# Altium PCB CR-10 Motherboard.PcbDoc (part 10 of 14)
Units mil, origin at the board's own origin, x right, y up, seen from the top; angles counter-clockwise.
Board outline 3970.48 x 2769.68 mil, 2 copper layers (TopLayer, BottomLayer); 147 components, 128 nets, 667 pads, 614 vias.
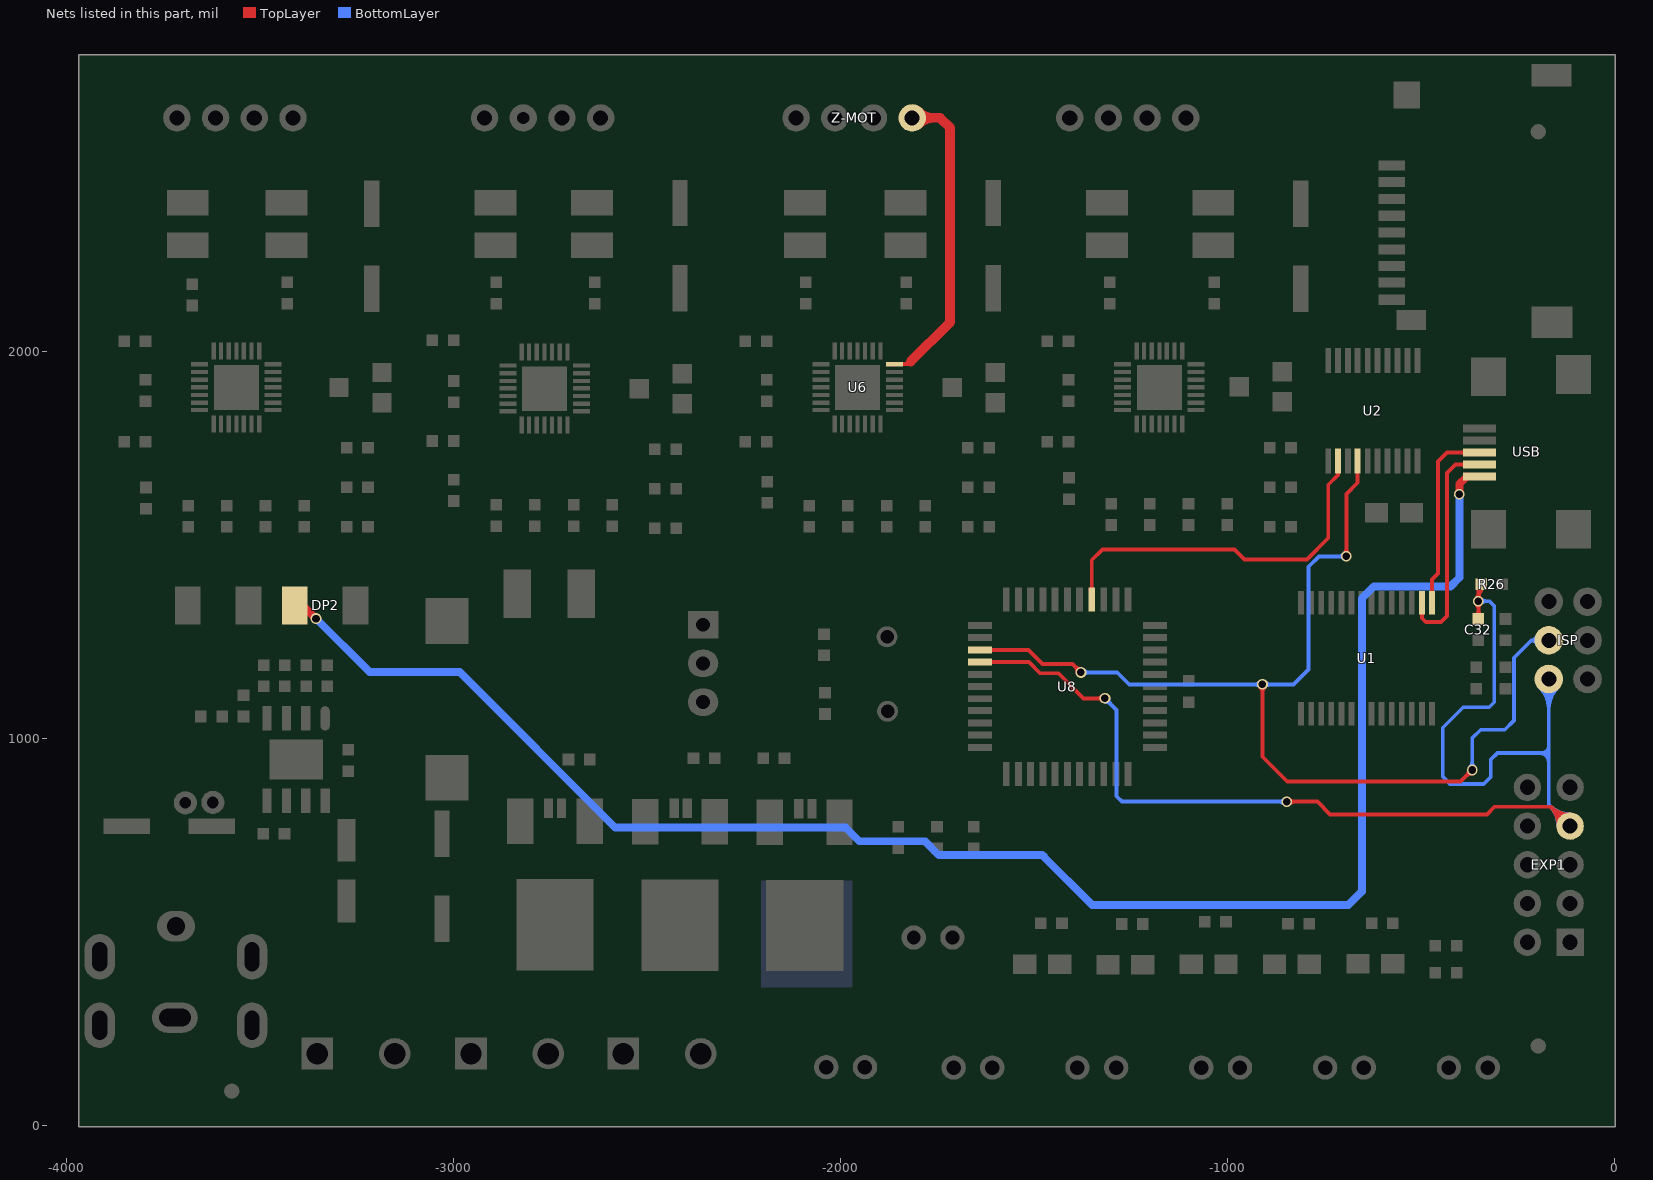
[diagram p10: the nets of this part, all layers, seen from the top]

## Via types
v1: diameter 28, hole 18, TopLayer to BottomLayer, tented both sides, 246 vias
v2: diameter 27.56, hole 19.68, TopLayer to BottomLayer, tented both sides, 196 vias
v3: diameter 20, hole 12, TopLayer to BottomLayer, tented both sides, 124 vias
v4: diameter 27.56, hole 11.81, TopLayer to BottomLayer, tented bottom, 16 vias
v5: diameter 27.56, hole 19.68, TopLayer to BottomLayer, 16 vias
v6: diameter 20, hole 12, TopLayer to BottomLayer, 12 vias
v7: diameter 28, hole 11.81, TopLayer to BottomLayer, tented both sides, 4 vias

## Nets (pads, with @x,y where several pads share a name; then routed paths per layer and width w, separated by ;. In a path a pad name is that pad's centre, name@x,y a point inside that pad or via, vN(x,y) a via of type N, cw(c..) or ccw(c..) an arc to the next point about the centre after c; other vN are vias at no path point) (continued)
NetZ-MOT_4: U6.21 Z-MOT.4 | length 1246.7
  TopLayer w10: U6.21@-1860.62,1967.88 -1860.12,1968.38 -1826,1968.38
  TopLayer w25: -1818.54,1974.84 -1717.07,2076.3 -1717.07,2575.25 ; Z-MOT.4@-1814.54,2604.84 -1742.54,2604.84 -1717.07,2579.38 -1717.07,2465.84 ; Z-MOT.4@-1798.32,2588.63 cw(c-1759.17,2549.48) -1759.17,2604.84 ; Z-MOT.4@-1798.32,2588.63 cw(c-1759.17,2549.48) -1759.17,2604.84 ; Z-MOT.4@-1798.32,2588.63 cw(c-1759.17,2549.48) -1759.17,2604.84 ; Z-MOT.4@-1798.32,2588.63 cw(c-1759.17,2549.48) -1759.17,2604.84 ; Z-MOT.4@-1798.32,2621.06 ccw(c-1759.17,2660.21) -1759.17,2604.84 ; Z-MOT.4@-1798.32,2621.06 ccw(c-1759.17,2660.21) -1759.17,2604.84 ; Z-MOT.4@-1798.32,2621.06 ccw(c-1759.17,2660.21) -1759.17,2604.84 ; Z-MOT.4@-1798.32,2621.06 ccw(c-1759.17,2660.21) -1759.17,2604.84
RESET: C32.2 EXP1.7 ISP.5 R26.1 U8.4 | length 4399.4
  TopLayer w10: U8.4@-1639.54,1198.84 -1512.84,1198.84 -1483.84,1169.84 -1436.54,1169.84 -1371.54,1104.84 v2(-1316.54,1104.84) ; v2(-846.54,837.84) -767.54,837.84 -734.54,804.84 -329.54,804.84 -309.54,824.84 -164.54,824.84 ; v2@-840.33,831.63 cw(c-825.34,816.65) -825.34,837.84 cw(c-825.34,859.04) v2@-840.33,844.05 ; C32.2@-358.61,1316.91 ccw(c-375.68,1333.98) -351.54,1333.98 ccw(c-327.39,1333.98) C32.2@-344.46,1316.91 ; v2@-357.74,1349.63 cw(c-372.73,1334.65) -351.54,1334.65 cw(c-330.34,1334.65) v2@-345.33,1349.63 ; v2@-357.74,1362.05 ccw(c-372.73,1377.04) -351.54,1377.04 ccw(c-330.34,1377.04) v2@-345.33,1362.05 ; C32.2@-351.54,1309.84 -351.54,1392.84 R26.1@-344.54,1399.84 ccw(c-327.64,1382.94) -351.54,1382.94 ; v2@-351.54,1358.8 cw(c-303.49,1358.8) R26.1@-337.46,1392.77 ; EXP1.7@-144.96,775.68 ccw(c-211.85,777.52) -164.53,824.84 ; EXP1.7@-134.96,775.4 ccw(c-179.88,776.64) -148.1,808.41 ccw(c-116.33,840.18) EXP1.7@-115.1,795.27 ; EXP1.7@-115.37,805.26 cw(c-117.21,872.16) -164.53,824.84 ; EXP1.7@-114.54,774.84 -164.54,824.84 ; U8.4@-1614.71,1196.01 cw(c-1607.88,1189.18) -1607.88,1198.84 ; U8.4@-1614.71,1196.01 cw(c-1607.88,1189.18) -1607.88,1198.84 ; U8.4@-1614.71,1196.01 cw(c-1607.88,1189.18) -1607.88,1198.84 ; U8.4@-1614.71,1196.01 cw(c-1607.88,1189.18) -1607.88,1198.84 ; U8.4@-1614.71,1196.01 cw(c-1607.88,1189.18) -1607.88,1198.84 ; U8.4@-1614.71,1196.01 cw(c-1607.88,1189.18) -1607.88,1198.84 ; U8.4@-1614.71,1201.67 ccw(c-1607.88,1208.5) -1607.88,1198.84 ; U8.4@-1614.71,1201.67 ccw(c-1607.88,1208.5) -1607.88,1198.84 ; U8.4@-1614.71,1201.67 ccw(c-1607.88,1208.5) -1607.88,1198.84 ; U8.4@-1614.71,1201.67 ccw(c-1607.88,1208.5) -1607.88,1198.84 ; U8.4@-1614.71,1201.67 ccw(c-1607.88,1208.5) -1607.88,1198.84 ; U8.4@-1614.71,1201.67 ccw(c-1607.88,1208.5) -1607.88,1198.84 ; -1337.73,1104.84 cw(c-1337.73,1083.65) -1322.74,1098.63 ccw(c-1337.73,1083.65) -1337.73,1104.84 ; -1337.73,1104.84 ccw(c-1337.73,1126.04) -1322.74,1111.05 cw(c-1337.73,1126.04) -1337.73,1104.84
  BottomLayer w10: v2(-1316.54,1104.84) -1286.54,1074.84 -1286.54,851.84 -1272.54,837.84 v2(-846.54,837.84) ; v2@-852.74,831.63 ccw(c-867.73,816.65) -867.73,837.84 ccw(c-867.73,859.04) v2@-852.74,844.05 ; v2(-351.54,1355.84) -322.54,1355.84 -310.54,1343.84 -310.54,1094.84 -323.54,1081.84 -390.54,1081.84 -443.54,1028.84 -443.54,902.84 -424.54,883.84 -337.54,883.84 -319.54,901.84 -319.54,946.84 -302.54,963.84 -169.54,963.84 ; v2@-345.33,1349.63 cw(c-330.34,1334.65) -330.34,1355.84 cw(c-330.34,1377.04) v2@-345.33,1362.05 ; ISP.5@-192.16,1132.22 cw(c-246.79,1077.59) -169.54,1077.59 cw(c-92.28,1077.59) ISP.5@-146.91,1132.22 ; ISP.5@-185.09,1139.29 cw(c-222.65,1101.73) -169.54,1101.73 cw(c-116.42,1101.73) ISP.5@-153.98,1139.29 ; -169.54,939.84 ccw(c-193.54,939.84) -193.54,963.84 ccw(c-188.54,982.84) -169.54,977.84 ; ISP.5@-169.54,1154.84 -169.54,829.84 EXP1.7@-114.54,774.84 ; EXP1.7@-144.97,774.84 ccw(c-218.44,774.84) -166.49,826.79 ccw(c-114.54,878.75) EXP1.7@-114.54,805.28 ; EXP1.7@-134.97,774.84 ccw(c-184.3,774.84) -149.42,809.72 ccw(c-114.54,844.61) EXP1.7@-114.54,795.28 ; -1301.55,1089.85 cw(c-1286.56,1104.84) -1307.76,1104.84 ccw(c-1286.56,1104.84) -1301.55,1089.85 ; -1301.55,1089.85 ccw(c-1316.54,1074.87) -1316.54,1096.06 cw(c-1316.54,1074.87) -1301.55,1089.85
SCLK: ISP.3 U2.4 U8.3 | length 3460.2
  TopLayer w10: U8.3@-1639.54,1229.84 -1513.84,1229.84 -1477.84,1193.84 -1400.54,1193.84 v2(-1378.54,1171.84) ; v2(-909.54,1140.84) -909.54,953.84 -845.54,889.84 -397.54,889.84 v2(-367.54,919.84) ; v2(-692.54,1471.84) -692.54,1632.84 -663.54,1661.84 U2.4@-663.54,1733.84 ; v2@-376.31,919.84 cw(c-397.51,919.84) -382.52,904.85 cw(c-367.54,889.87) v2@-367.54,911.06 ; U8.3@-1614.71,1227.01 cw(c-1607.88,1220.19) -1607.88,1229.84 ; U8.3@-1614.71,1227.01 cw(c-1607.88,1220.19) -1607.88,1229.84 ; U8.3@-1614.71,1227.01 cw(c-1607.88,1220.19) -1607.88,1229.84 ; U8.3@-1614.71,1227.01 cw(c-1607.88,1220.19) -1607.88,1229.84 ; U8.3@-1614.71,1227.01 cw(c-1607.88,1220.19) -1607.88,1229.84 ; U8.3@-1614.71,1227.01 cw(c-1607.88,1220.19) -1607.88,1229.84 ; U8.3@-1614.71,1232.67 ccw(c-1607.88,1239.5) -1607.88,1229.84 ; U8.3@-1614.71,1232.67 ccw(c-1607.88,1239.5) -1607.88,1229.84 ; U8.3@-1614.71,1232.67 ccw(c-1607.88,1239.5) -1607.88,1229.84 ; U8.3@-1614.71,1232.67 ccw(c-1607.88,1239.5) -1607.88,1229.84 ; U8.3@-1614.71,1232.67 ccw(c-1607.88,1239.5) -1607.88,1229.84 ; U8.3@-1614.71,1232.67 ccw(c-1607.88,1239.5) -1607.88,1229.84 ; -1393.52,1186.83 cw(c-1408.51,1171.84) -1387.31,1171.84 ccw(c-1408.51,1171.84) -1393.52,1186.83 ; -1393.52,1186.83 ccw(c-1378.54,1201.82) -1378.54,1180.62 cw(c-1378.54,1201.82) -1393.52,1186.83 ; -909.54,1119.65 cw(c-888.34,1119.65) -903.33,1134.63 ccw(c-888.34,1119.65) -909.54,1119.65 ; -909.54,1119.65 ccw(c-930.73,1119.65) -915.74,1134.63 cw(c-930.73,1119.65) -909.54,1119.65 ; -692.54,1493.04 cw(c-713.73,1493.04) -698.74,1478.05 ccw(c-713.73,1493.04) -692.54,1493.04 ; -692.54,1493.04 ccw(c-671.34,1493.04) -686.33,1478.05 cw(c-671.34,1493.04) -692.54,1493.04
  BottomLayer w10: v2(-1378.54,1171.84) -1284.54,1171.84 -1253.54,1140.84 -829.54,1140.84 -790.54,1179.84 -790.54,1444.84 -763.54,1471.84 v2(-692.54,1471.84) ; v2@-373.74,926.05 ccw(c-388.73,941.04) -367.54,941.04 ccw(c-346.34,941.04) v2@-361.33,926.05 ; v2(-367.54,919.84) -367.54,1001.84 -345.54,1023.84 -283.54,1023.84 -259.54,1047.84 -259.54,1209.84 -214.54,1254.84 ; ISP.3@-199.76,1244.34 ccw(c-214.53,1239.2) -214.53,1254.84 ; ISP.3@-199.76,1265.35 cw(c-214.53,1270.48) -214.53,1254.84 ; ISP.3@-169.54,1254.84 -214.54,1254.84 ; -1357.34,1171.84 cw(c-1357.34,1193.04) -1372.33,1178.05 ccw(c-1357.34,1193.04) -1357.34,1171.84 ; -1357.34,1171.84 ccw(c-1357.34,1150.65) -1372.33,1165.63 cw(c-1357.34,1150.65) -1357.34,1171.84 ; -930.73,1140.84 cw(c-930.73,1119.65) -915.74,1134.63 ccw(c-930.73,1119.65) -930.73,1140.84 ; -930.73,1140.84 ccw(c-930.73,1162.04) -915.74,1147.05 cw(c-930.73,1162.04) -930.73,1140.84 ; -888.34,1140.84 cw(c-888.34,1162.04) -903.33,1147.05 ccw(c-888.34,1162.04) -888.34,1140.84 ; -888.34,1140.84 ccw(c-888.34,1119.65) -903.33,1134.63 cw(c-888.34,1119.65) -888.34,1140.84 ; -713.73,1471.84 cw(c-713.73,1450.65) -698.74,1465.63 ccw(c-713.73,1450.65) -713.73,1471.84 ; -713.73,1471.84 ccw(c-713.73,1493.04) -698.74,1478.05 cw(c-713.73,1493.04) -713.73,1471.84
SD-SS: U2.2 U8.37 | length 1073.5
  TopLayer w10: U8.37@-1350.54,1360.84 -1350.54,1461.84 -1322.54,1489.84 -981.54,1489.84 -955.54,1463.84 -794.54,1463.84 -739.54,1518.84 -739.54,1656.84 -714.54,1681.84 U2.2@-714.54,1733.84 ; U8.37@-1353.36,1385.67 ccw(c-1360.19,1392.5) -1350.54,1392.5 ; U8.37@-1353.36,1385.67 ccw(c-1360.19,1392.5) -1350.54,1392.5 ; U8.37@-1353.36,1385.67 ccw(c-1360.19,1392.5) -1350.54,1392.5 ; U8.37@-1353.36,1385.67 ccw(c-1360.19,1392.5) -1350.54,1392.5 ; U8.37@-1353.36,1385.67 ccw(c-1360.19,1392.5) -1350.54,1392.5 ; U8.37@-1353.36,1385.67 ccw(c-1360.19,1392.5) -1350.54,1392.5 ; -1350.54,1392.5 ccw(c-1340.88,1392.5) U8.37@-1347.71,1385.67 ; -1350.54,1392.5 ccw(c-1340.88,1392.5) U8.37@-1347.71,1385.67 ; -1350.54,1392.5 ccw(c-1340.88,1392.5) U8.37@-1347.71,1385.67 ; -1350.54,1392.5 ccw(c-1340.88,1392.5) U8.37@-1347.71,1385.67 ; -1350.54,1392.5 ccw(c-1340.88,1392.5) U8.37@-1347.71,1385.67 ; -1350.54,1392.5 ccw(c-1340.88,1392.5) U8.37@-1347.71,1385.67
USBDM: U1.16 USB.4 | length 615.8
  TopLayer w10: U1.16@-497.54,1351.84 -497.54,1311.84 -487.54,1301.84 -448.54,1301.84 -432.54,1317.84 -432.54,1686.84 -410.54,1708.84 USB.4@-348.54,1708.84 ; -393.61,1708.84 cw(c-393.61,1696.77) -385.07,1705.31 ccw(c-393.61,1696.77) -393.61,1708.84 ; -393.61,1708.84 ccw(c-393.61,1720.91) -385.07,1712.38 cw(c-393.61,1720.91) -393.61,1708.84
USBDP: U1.15 USB.3 | length 526.1
  TopLayer w10: U1.15@-471.54,1351.84 -471.54,1411.84 -455.54,1427.84 -455.54,1716.84 -432.54,1739.84 USB.3@-348.54,1739.84 ; -393.61,1739.84 cw(c-393.61,1727.77) -385.07,1736.31 ccw(c-393.61,1727.77) -393.61,1739.84 ; -393.61,1739.84 ccw(c-393.61,1751.91) -385.07,1743.38 cw(c-393.61,1751.91) -393.61,1739.84
UVCC: DP2.1 USB.5 | length 4434.8
  TopLayer w10: USB.5@-381.54,1677.84 USB.5@-348.54,1677.84
  TopLayer w20: DP2.1@-3410,1345 -3389,1345 v2(-3355,1311) ; v2(-400.54,1631.84) -400.54,1658.84 USB.5@-381.54,1677.84
  BottomLayer w10: -1478.54,699.84 -1470.54,699.84
  BottomLayer w20: v2@-3355.54,1311.84 -3216.54,1172.84 -2983.54,1172.84 -2581.54,770.84 -1986.54,770.84 -1951.54,735.84 -1781.54,735.84 -1745.54,699.84 -1478.54,699.84 -1349.54,570.84 -687.54,570.84 -652.54,605.84 -652.54,1362.84 -621.54,1393.84 -423.54,1393.84 -400.54,1416.84 v2(-400.54,1631.84)